# Altium PCB PCB_Ticketing_Slave_QFN.PcbDoc
Units mm, origin at the board's own origin, x right, y up, seen from the top; angles counter-clockwise.
Board outline 80.7 x 51.5 mm, 2 copper layers (Top Layer, Bottom Layer), stack 1.586 mm thick; 49 components, 35 nets, 191 pads, 70 vias.
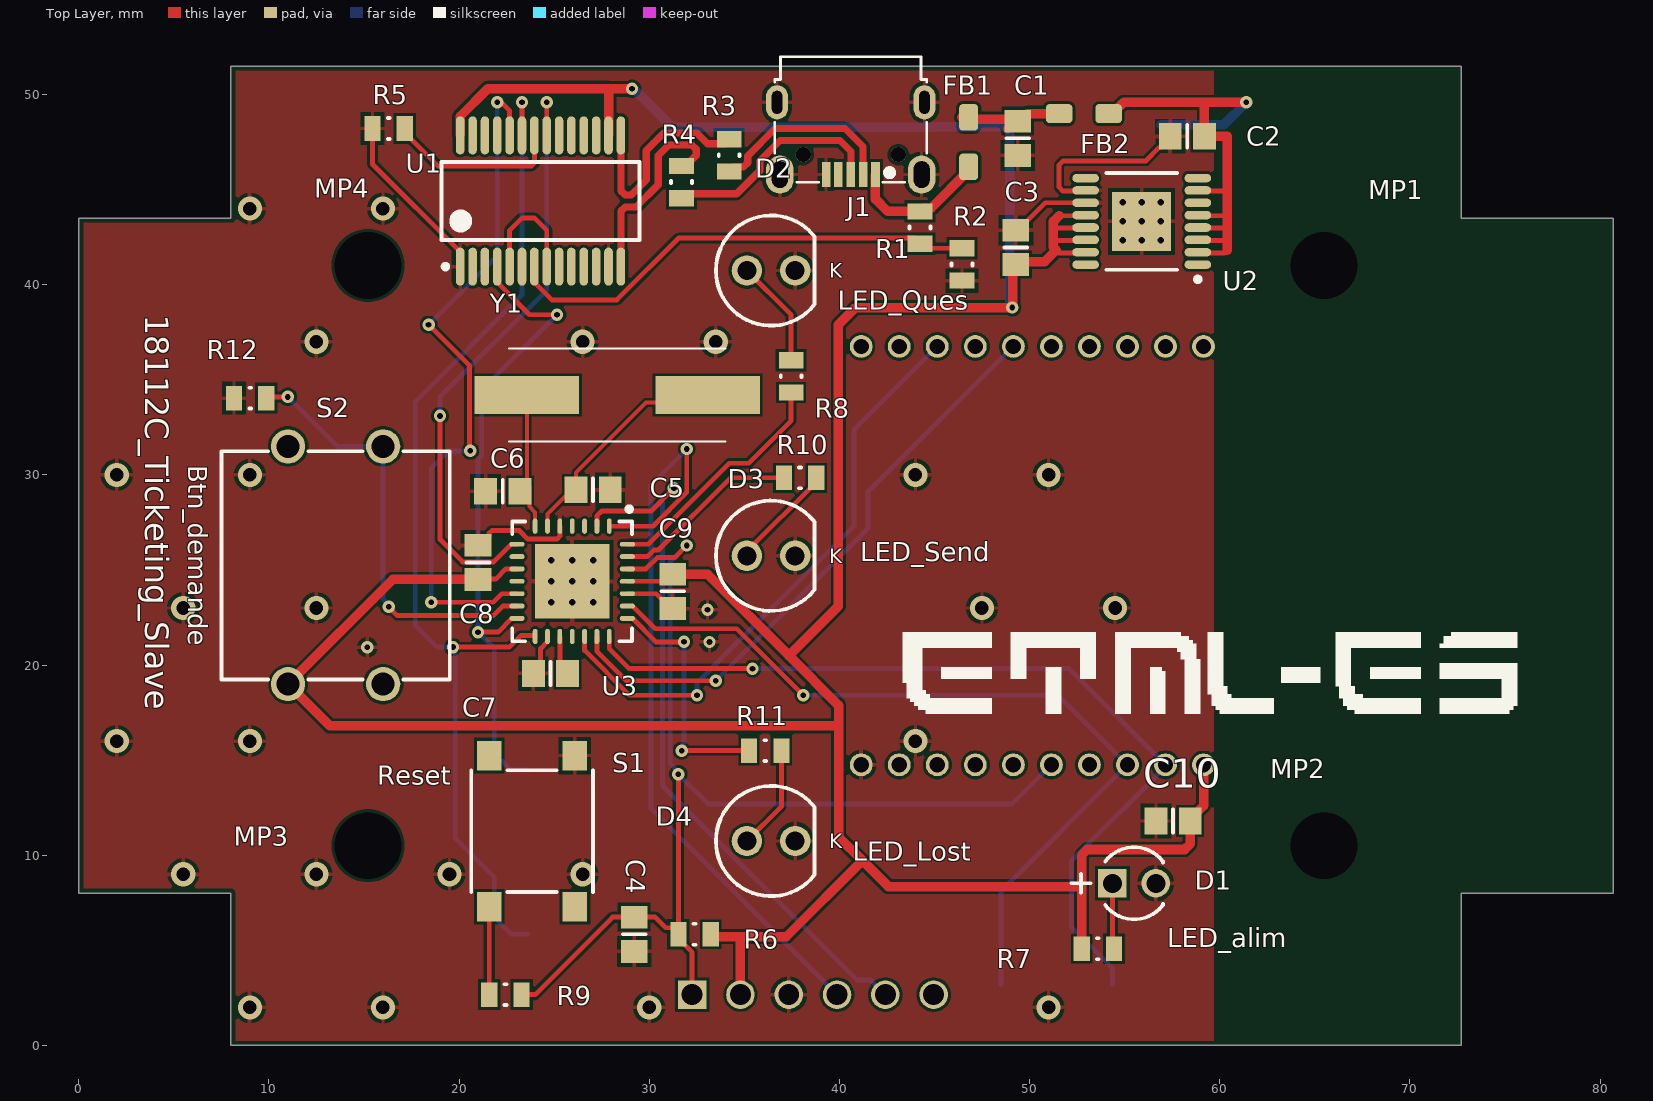
[diagram p0: Top Layer view]
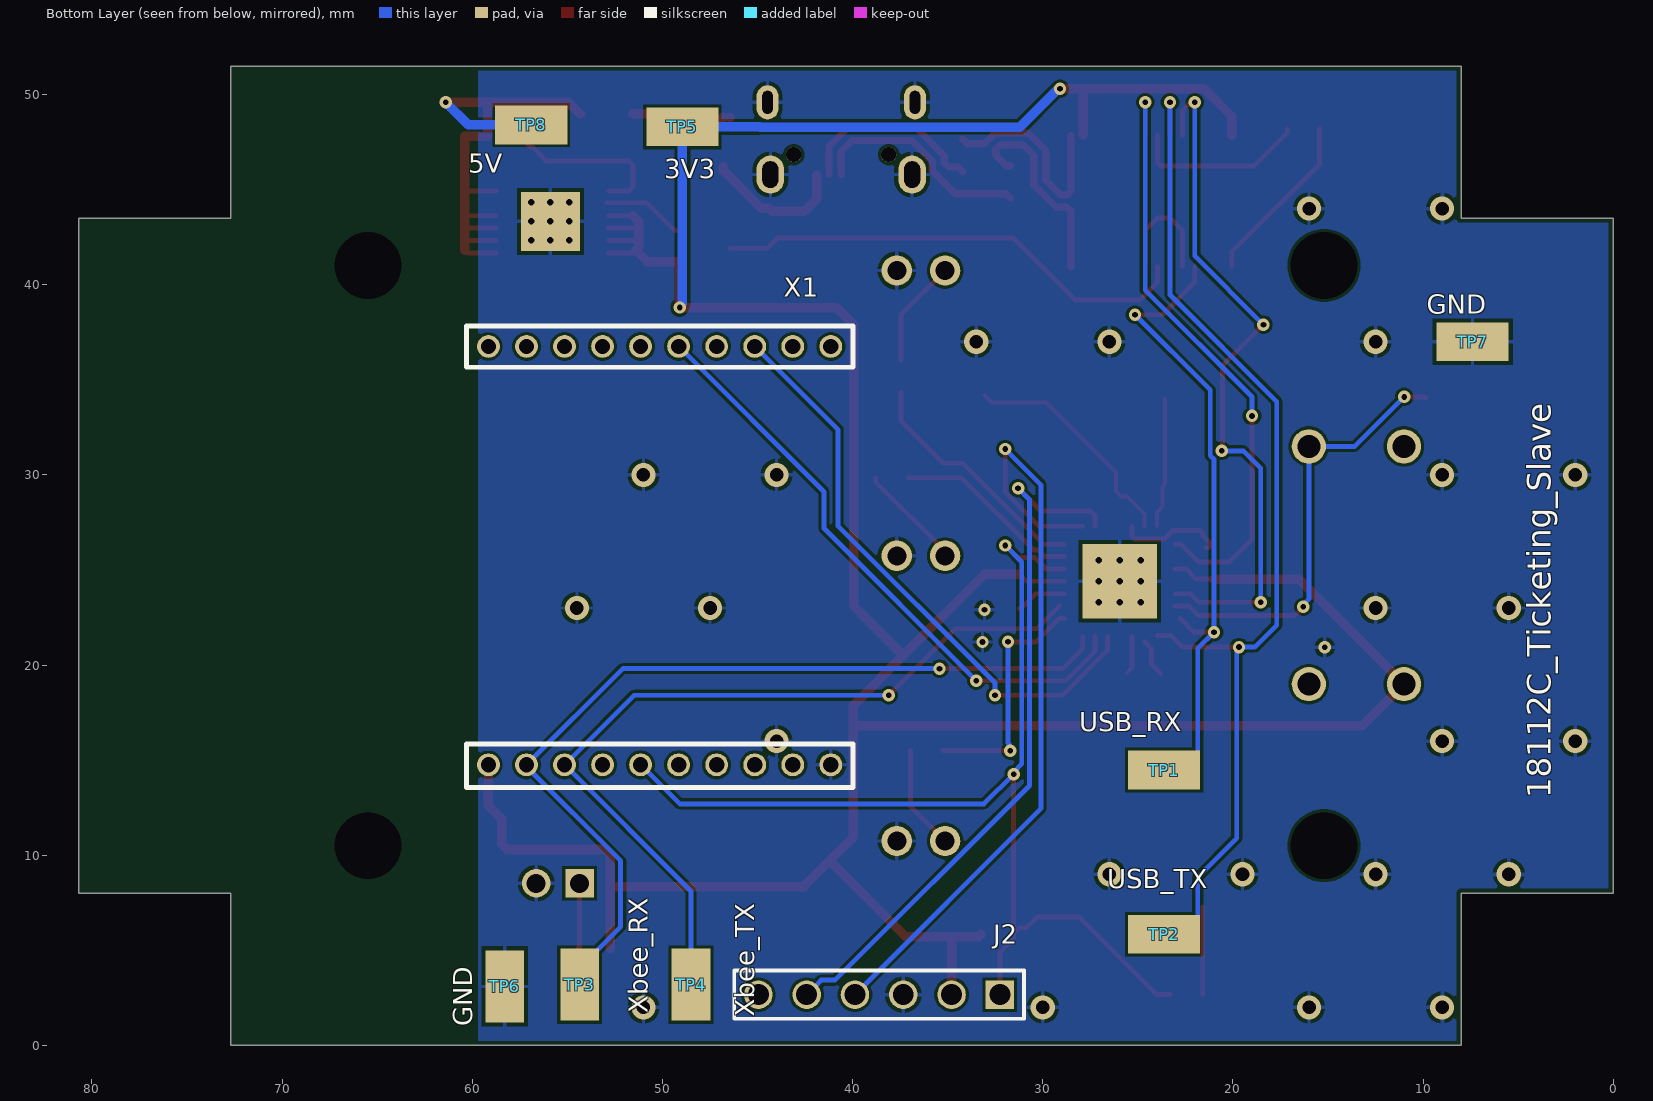
[diagram p1: Bottom Layer view, seen from below]

## Layer stack, top to bottom
Top Solder: solder mask 0.0102, Solder Resist, Dk 3.5
Top Layer: signal copper 0.018
Dielectric1: core 1.55, FR-4, Dk 4.8
Bottom Layer: signal copper 0.018
Bottom Solder: solder mask 0.0102, Solder Resist, Dk 3.5

## Board outline
0,8 0,43.5 8,43.5 8,51.5 72.7,51.5 72.7,43.5 80.7,43.5 80.7,8 72.7,8 72.7,0 8,0 8,8

## Design rules (kind name [scope] priority, off if disabled: settings)
BoardOutlineClearance [All] p1: gap=0.25 ignorepadtopadclearanceinfootprint=FALSE except(0: Arc-SplitContinuation Track-SplitContinuation SMDPad-SplitContinuation THPad-SplitContinuation Via-SplitContinuation Fill-SplitContinuation Poly-SplitContinuation Region-SplitContinuation Text-SplitContinuation)
Clearance Clearance-xPP-xTP-xTT [All] p1: gap=0.15 ignorepadtopadclearanceinfootprint=FALSE except(0: Arc-Hole Track-Hole SMDPad-Hole THPad-Hole Via-Hole Fill-Hole Poly-Hole Region-Hole Text-Hole)
ComponentClearance [All] p1: gap=0.25 collisioncheckmode=3 verticalgap=0.25 showdistances=FALSE
DiffPairsRouting [All] p1: maxlimit=0.25 minlimit=0.25 mostfreqgap=0.25 toplayer_minwidth=0.381 toplayer_maxwidth=0.381 toplayer_prefwidth=0.381 bottomlayer_minwidth=0.381 bottomlayer_maxwidth=0.381 bottomlayer_prefwidth=0.381 maxuncoupledlength=12.5
Height [All] p1: minheight=0 maxheight=25 prefheight=12.5
HoleSize HoleSize-PTH [All] p1: absolutevalues=TRUE maxlimit=10 minlimit=0.25 maxpercent=80.000 minpercent=20.000
HoleToHoleClearance [All] p1: gap=0.35 allowstackedmicrovias=TRUE
MinimumAnnularRing "Minimum IAR  >0.45mm" [((ObjectKind = 'Pad') OR (ObjectKind = 'Via')) And (Layer = 'MultiLayer') And (HoleDiameter > AsMM(0.45))] p1: minimumring=0.175 // minimum inner annular ring for pads > 0.45mm finished hole size
MinimumAnnularRing "Minimum IAR <=0.45mm" [((ObjectKind = 'Pad') OR (ObjectKind = 'Via')) And (Layer = 'MultiLayer') And (HoleDiameter <= AsMM(0.45))] p2: minimumring=0.175 // minimum inner annular ring for pads <= 0.45mm finished hole size
MinimumSolderMaskSliver [All] p1: minsoldermaskwidth=0.08
PasteMaskExpansion [All] p1: expansion=-0.025
PlaneClearance PlaneClearance-IPI [All] p1: clearance=0.25
PlaneConnect [All] p1: planeconnectstyle=Relief reliefexpansion=0.175 reliefentries=4 reliefconductorwidth=0.2 reliefairgap=0.2
PolygonConnect PolygonConnect-xTW [All] p1: connectstyle=Relief reliefconductorwidth=0.2 reliefentries=4 polygonreliefangle="90 Angle" airgapwidth=0.2
RoutingCorners [All] p1: cornerstyle=45-Degree minsetback=2.5 maxsetback=2.5
RoutingVias RoutingViasES [All] p1: holewidth=0.3 width=0.65 viastyle="Through Hole" minholewidth=0.25 minwidth=0.61 maxholewidth=0.45 maxwidth=0.8 // finishet hole size <= 0.45mm
SilkToSilkClearance [All] p1: silktosilkclearance=0.2
SilkToSolderMaskClearance SilkscreenOverComponentPads [IsPad] p1: minsilkscreentomaskgap=0.2 clearancetoexposedcopper=TRUE
SolderMaskExpansion [All] p1: expansion=0 istentingtop=FALSE
UnRoutedNet [All] p1: checkbadconnections=TRUE
Width "Width Power" [InNetClass('POWER')] p1: maxlimit=0.5 minlimit=0.254 preferedwidth=0.5
Width Width-xTW [All] p2: maxlimit=1.5 minlimit=0.15 preferedwidth=0.254
17 further rules are at their usual default settings.

## Classes and differential pairs
net class POWER: 3V3 5V GND NetC1_1 NetR1_2 NetU2_6 VBUS
component class Designator: D1 D2 D3 D4 MP1 MP2 MP3 MP4 R7 R8 R10 R11 R12 S2
differential pair USB_D: +USB_D_P -USB_D_N
differential pair U_D: +U_D_P -U_D_N

## Components (designator, comment, footprint, x,y, rotation, side; value= is the part's Value field where it differs from the comment)
C1 "680nF" 6-0805_N 49.384,47.7 r270 top
C2 "10uF" 6-0805_N 58.3,47.8 r180 top
C3 "10uF" 6-0805_N 49.284,41.963 r270 top
C4 "120nF" 6-0805_N 29.21,5.842 r90 top
C5 "22pF" 6-0805_N 27.052,29.21 r180 top
C6 "22pF" 6-0805_N 22.3,29.135 r0 top
C7 "10uF" 6-0805_N 24.811,19.558 r0 top
C8 "100nF" 6-0805_N 21,25.4 r270 top
C9 "100nF" 6-0805_N 31.242,23.876 r90 top
C10 "100nF" 6-0805_N 57.551,11.8 r0 top
D1 "WP424IDT" LED-2P-2.28-3MM 55.499,8.525 r0 top
D2 "WP7113LGD" "Type 5mm" 36.41,40.746 r0 top locked
D3 "WP7113ND" "Type 5mm" 36.41,25.746 r0 top locked
D4 "WP7113LID" "Type 5mm" 36.41,10.746 r0 top locked
FB1 "600Ohm, 2A" "WE-CBF_0805_High Current" 46.8,47.5 r90 top
FB2 "600Ohm, 2A" "WE-CBF_0805_High Current" 52.859,49 r0 top
J1 "629105150521" 629105150521 40.6,48.691 r180 top
J2 "76384-406LF" 76384-406LF 32.258,2.667 r0 bottom
MP1 "M3" 9774010151 65.485,41.01 r0 top locked
MP2 "M3" 9774010151 65.485,10.5 r0 top locked
MP3 "M3" 9774010151 15.215,10.5 r0 top locked
MP4 "M3" 9774010151 15.215,41.01 r0 top locked
R1 "10k" RESC0805(2012)_L 44.244,43.007 r270 top
R2 "20k" RESC0805(2012)_L 46.45,41.063 r270 top
R3 "24R" RESC0805(2012)_L 34.207,46.8 r90 top
R4 "24R" RESC0805(2012)_L 31.7,45.4 r90 top
R5 "1k" RESC0805(2012)_L 16.3,48.212 r180 top
R6 "47k" RESC0805(2012)_L 32.385,5.842 r180 top
R7 "68" RESC0805(2012)_L 53.594,5.08 r180 top
R8 "750" RESC0805(2012)_L 37.465,35.179 r270 top
R9 "120" RESC0805(2012)_L 22.44,2.667 r0 top value=10k
R10 "68" RESC0805(2012)_L 37.934,29.845 r180 top value=680
R11 "820" RESC0805(2012)_L 36.1,15.5 r180 top value=680
R12 "10k" RESC0805(2012)_L 9.017,34.036 r180 top
S1 "430182050816" 430182050816 23.84,11.265 r270 top
S2 "430466073726" 4304x60737x6_12x12x7.3 13.51,25.246 r90 top locked
TP1 "" KSTN-5019_V 23.622,14.478 r180 bottom
TP2 "" KSTN-5019_V 23.622,5.842 r180 bottom
TP3 "" KSTN-5019_V 54.359,3.2 r270 bottom value=Xbee_RX
TP4 "" KSTN-5019_V 48.5,3.2 r270 bottom value=Xbee_TX
TP5 "" KSTN-5019_V 48.952,48.3 r0 bottom
TP6 "" KSTN-5019_V 58.3,3.1 r270 bottom
TP7 "" KSTN-5019_V 7.4,37 r0 bottom
TP8 "" KSTN-5019_V 56.9,48.4 r0 bottom
U1 "CY7C64225-28PVXC" CYP-PVX28_N 24.287,44.4 r90 top
U2 "MAX1793EUE33+" TSOP65P640X110_HS-17N 55.9,43.332 r180 top
U3 "PIC32MX130F064B-I/ML" MCHP-QFN-ML28_L 25.952,24.402 r270 top locked
X1 "Header 2x10" ZB-SB 50.15,25.755 r90 bottom locked
Y1 "LFXTAL003151" LFXTAL003151REEL 28.321,34.2 r180 top

## Footprints (in the part's own frame and the unit in brackets; to place one, negate y for a bottom-side part, rotate by r counter-clockwise, add the part's x,y. Pads: shape width x height; smd on the part's side, far side on the other; paste and mask are expansions set on the pad)
6-0805_N [mm] "Chip Resistor, Body 2.0x1.2mm, IPC Medium Density"
  rect 1.2x1.4 smd: 1(-0.9,0) 2(0.9,0)
  silkscreen extent 0,-0.6 0,0.6, body extent -1.07,-0.7 1.07,0.7, height 0.7
4304x60737x6_12x12x7.3 [mm] "12x12mm washable Tact Switch, THT version"
  round 1.8 hole 1.2: 1(-6.25,2.5) 2(6.25,2.5) 3(-6.25,-2.5) 4(6.25,-2.5)
  silkscreen extent -6,-6 6,6, body extent -6.99,-6 6.99,6, height 7.35
76384-406LF [mm] "Connector; Header; 6 Position"
  rect 1.5x1.5 hole 1.1: 1(0,0)
  round 1.5 hole 1.1: 2(2.54,0) 3(5.08,0) 4(7.62,0) 5(10.16,0) 6(12.7,0)
  silkscreen extent -1.27,-1.27 13.97,1.27, body extent -0.72,-2.58 13.52,2.67, height 8.84
9774010151 [mm] "M2.5 Thread Internal, Length 1mm"
  round 0 hole 3.51 unplated paste-403.566: 1(0,0)
430182050816 [mm] "SMD Tact Switch, body 6x6mm"
  rect 1.55x1.3 smd: 1(-3.975,2.25) 2(-3.975,-2.25) 3(3.975,2.25) 4(3.975,-2.25)
  silkscreen extent -3.2,-3.2 3.2,3.2, body extent -4.5,-3.1 4.5,3.1, height 5.03
629105150521 [mm] "Micro USB 2.0 SMT Type B Horizontal 5 Contacts High Current"
  rect 0.45x1.3 smd: 1(-1.3,2.9) 2(-0.65,2.9) 3(0,2.9) 4(0.65,2.9) 5(1.3,2.9)
  oval 1.15x1.8 hole 0.55 slot 1.2 at 90 deg: Shell(-3.875,-0.9) Shell(3.875,-0.9)
  oval 1.45x2 hole 0.85 slot 1.4 at 90 deg: Shell(-3.725,2.9) Shell(3.725,2.9)
  round 0.8 hole 0.8 unplated: ""(-2.5,1.85) ""(2.5,1.85)
  silkscreen extent -4,-3.3 4,3.3, body extent -4,-3.3 4,3.3, height 2.71
CYP-PVX28_N [mm] "SOP, 28-Leads, Body 10.2x5.3mm, Pitch 0.65mm, IPC Medium Density"
  oval 2x0.45 smd: 1(-3.45,4.225) 2(-3.45,3.575) 3(-3.45,2.925) 4(-3.45,2.275) 5(-3.45,1.625) 6(-3.45,0.975) 7(-3.45,0.325) 8(-3.45,-0.325) 9(-3.45,-0.975) 10(-3.45,-1.625) 11(-3.45,-2.275) 12(-3.45,-2.925) 13(-3.45,-3.575) 14(-3.45,-4.225) 15(3.45,-4.225) 16(3.45,-3.575) 17(3.45,-2.925) 18(3.45,-2.275) 19(3.45,-1.625) 20(3.45,-0.975) 21(3.45,-0.325) 22(3.45,0.325) 23(3.45,0.975) 24(3.45,1.625) 25(3.45,2.275) 26(3.45,2.925) 27(3.45,3.575) 28(3.45,4.225)
  silkscreen extent -3.57,-5.2 2.05,5.2, body extent -3,-4.95 3,4.95, height 1.75
KSTN-5019_V [mm] "Test Point, 1-Leads, Body 3.81x2.03mm"
  rect 3.8x2.03 smd: 1(0,0)
  body extent -1.91,-1.02 1.9,1.02, height 2.29
LED-2P-2.28-3MM [mm] "LED, 2-Leads, Dia 3mm, Pitch 2.28mm"
  rect 1.5x1.5 hole 1: 1(-1.14,0)
  round 1.5 hole 1: 2(1.14,0)
  silkscreen extent -3.29,-1.9 1.52,1.9, body extent -1.9,-1.91 1.52,1.91, height 5.3
LFXTAL003151REEL [mm]
  rect 5.5x2 smd: 1(-4.75,0) 2(4.75,0)
  silkscreen extent -5.7,-2.45 5.7,2.45, body extent -5.81,-2.35 5.8,2.35, height 4.2
MCHP-QFN-ML28_L [mm] "QFN, 28-Leads, Body 6x6mm, Pitch 0.65mm, Thermal Pad 3.7x3.7mm, IPC High Density"
  oval 0.8x0.25 smd: 1(-2.9,1.95) 2(-2.9,1.3) 3(-2.9,0.65) 4(-2.9,0) 5(-2.9,-0.65) 6(-2.9,-1.3) 7(-2.9,-1.95) 15(2.9,-1.95) 16(2.9,-1.3) 17(2.9,-0.65) 18(2.9,0) 19(2.9,0.65) 20(2.9,1.3) 21(2.9,1.95)
  oval 0.25x0.8 smd: 8(-1.95,-2.9) 9(-1.3,-2.9) 10(-0.65,-2.9) 11(0,-2.9) 12(0.65,-2.9) 13(1.3,-2.9) 14(1.95,-2.9) 22(1.95,2.9) 23(1.3,2.9) 24(0.65,2.9) 25(0,2.9) 26(-0.65,2.9) 27(-1.3,2.9) 28(-1.95,2.9)
  rect 3.93x3.93 smd: 29(0,0)
  rect 3.93x3.93 smd far side: 29(0,0)
  silkscreen extent -3.92,-3.15 3.15,3.15, body extent -3,-3 3,3, height 1
RESC0805(2012)_L [mm] "Chip Resistor, Body 2.0x1.3mm, IPC High Density"
  rect 0.85x1.3 smd: 1(-0.85,0) 2(0.85,0)
  silkscreen extent -0.05,-0.55 0.05,0.55, body extent -1.1,-0.67 1.1,0.68, height 0.7
TSOP65P640X110_HS-17N [mm] "TSOP, 16-Leads, Body 5.00x4.40mm, Pitch 0.65mm, Thermal Pad 3.10x3.10mm, IPC Medium Density"
  oval 1.4x0.45 smd: 1(-2.95,2.275) 2(-2.95,1.625) 3(-2.95,0.975) 4(-2.95,0.325) 5(-2.95,-0.325) 6(-2.95,-0.975) 7(-2.95,-1.625) 8(-2.95,-2.275) 9(2.95,-2.275) 10(2.95,-1.625) 11(2.95,-0.975) 12(2.95,-0.325) 13(2.95,0.325) 14(2.95,0.975) 15(2.95,1.625) 16(2.95,2.275)
  rect 3.1x3.1 smd: 17(0,0)
  rect 3.1x3.1 smd far side: 17(0,0)
  silkscreen extent -3.08,-2.55 1.85,3.17, body extent -3.19,-2.55 3.19,2.55, height 1.1
"Type 5mm" [mm] "THT, LED-5mm, 2pin- Body 5.8mm"
  round 1.6 hole 1: 1(1.27,0) 2(-1.27,0)
  silkscreen extent -2.9,-2.9 2.29,2.9, body extent -2.9,-2.9 2.5,2.9, height 11.7
"WE-CBF_0805_High Current" [mm]
  rrect40% 1.4x1 smd: 1(-1.3,0) 2(1.3,0)
  body extent -1,-0.6 1,0.6, height 0.9
ZB-SB [mm] "Header"
  round 1.2 hole 0.8: 1(-11,9) 2(-11,7) 3(-11,5) 4(-11,3) 5(-11,1) 6(-11,-1) 7(-11,-3) 8(-11,-5) 9(-11,-7) 10(-11,-9) 11(11,9) 12(11,7) 13(11,5) 14(11,3) 15(11,1) 16(11,-1) 17(11,-3) 18(11,-5) 19(11,-7) 20(11,-9)
  silkscreen extent -12.19,-10.16 12.06,10.16, body extent -12.55,-10.34 12.45,30.66, height 7.5

## Part data
C1: library part 885012207098, "WCAP-CSGP General Purpose Ceramic Capacitors, size 0805, 100nF, +/-10%, 50VDC", Supplier Part Number=732-7663-1-ND, Capacitance=680nF, Supplier=Digi-Key, Supplier Part Number 1=732-7663-1-ND, Supplier unit price=0.13, Technical Reference=X7R0805104K050DFCT10000
C2 C3 C7: library part Cap, "Capacitor", Supplier Part Number=1276-1298-1-ND, Supplier=Digi-Key, Supplier unit price=0.1
  C2 C3: Capacitance=10uF, LatestRevisionDate=17-Jul-2002, LatestRevisionNote="Re-released for DXP Platform.", PackageDescription="Radial Cap, Thru-Hole; 2 Leads; 0.3 in Pin Spacing", PackageReference=RAD-0.3, Published=8-Jun-2000, Publisher="Altium Limited"
C4: library part Cap, "Capacitor", Supplier Part Number=311-4323-1-ND, Supplier=Digi-Key, Supplier unit price=0.18
C5 C6: library part CMP-2007-03167-1, "VJ0805Y104KNAAT", Supplier Part Number=399-C0805C220J5GAC7800CT-ND, Supplier=Digi-Key, Supplier unit price=0.1
C8 C9: library part Cap, "Capacitor", Supplier Part Number=399-C0805C104M5RAC7800CT-ND, Supplier=Digi-Key, Supplier unit price=0.1
C10: library part Cap_1, "Capacitor", Supplier Part Number=399-C0805C104M5RAC7800CT-ND, Supplier=Digi-Key, Supplier unit price=0.1
D1: library part LED, "LED", Color=Red, Supplier Part Number=754-1305-ND, Supplier=Digi-Key, Supplier unit price=0.4
D2: library part LED, "LED", Color=Green, Supplier Part Number=754-1265-ND, Supplier=Digi-Key, Supplier unit price=0.33
D3: library part LED, "LED", Color=Orange, Supplier Part Number=754-1896-ND, Supplier=Digi-Key, Supplier unit price=0.3
D4: library part LED, "LED", Color=Red, Supplier Part Number=754-1266-ND, Supplier=Digi-Key, Supplier unit price=0.33
FB1 FB2: library part 742792040, "WE-CBF SMT EMI Suppression Ferrite Bead, size 0805, 600Ohm, 2A", DC Resistance max.=0.15Ohm, Operating Temperature="-55 to +125degC", Rated Current=2A, Supplier Part Number=732-1620-1-ND, ComponentLink1Description=Manufacturer, ComponentLink1URL=http://www.we-online.de, ComponentLink2Description=Datasheet, ComponentLink2URL=https://katalog.we-online.com/pbs/datasheet/742792040.pdf, Impedance max.=700Ohm, Impedance@100 MHz=600Ohm, Mounting Technology=SMT, Packaging="Tape and Reel", Part Number=742792040, Published Date="March 2019", Publisher="Wurth Elektronik", Size=0805, Supplier=Digi-Key, Supplier Part Number 1=732-1620-1-ND, Supplier unit price=0.22, Type="High Current"
J1: "Micro USB 2.0 SMT Type B Horizontal 5 Contacts High Current WR-COM", Part Number=732-5960-1-ND, ComponentLink1Description=Manufacturer, ComponentLink1URL=http://www.we-online.de, ComponentLink2Description=Datasheet, ComponentLink2URL=http://katalog.we-online.de/em/datasheet/629105150521.pdf, Construction=SMT, Gender=Receptacle, Interface Type="Type B", Published Date="April 2017", Publisher="Wurth Elektronik", Sub-Family="Micro USB 2.0", Supplier=Digi-key, Supplier Part Number=732-5960-1-ND, Supplier unit price=2.12, Type=Horizontal
J2: library part "Header 6", "Header, 6-Pin", Supplier Part Number 1=609-1321-ND, LatestRevisionDate=17-Jul-2002, LatestRevisionNote="Re-released for DXP Platform.", Publisher="Altium Limited", Supplier 1=Digi-Key, Supplier unit price=0.66
MP1 MP2 MP3 MP4: library part 9774010151, "WA-SMSI SMT Steel Spacer, M2.5 Thread Internal, Length 1mm", Supplier=Digi-Key
R1: library part CMP-1013-00122-1, "100K 0.125W 5% 0805 (2012 Metric)  SMD", Case-EIA=0805, Case-Metric=2012, Power="0.125 W", Supplier Part Number=311-10KLGCT-ND, Tolerance="5 %", Supplier=Digi-Key, Supplier unit price=0.1, Technology=SMT
R2: library part CMP-1013-00122-1, "100K 0.125W 5% 0805 (2012 Metric)  SMD", Case-EIA=0805, Case-Metric=2012, Power="0.125 W", Supplier Part Number=RNCP0805FTD20K0CT-ND, Tolerance="5 %", Supplier=Digi-Key, Supplier unit price=0.1, Technology=SMT
R3 R4: library part CMP-1013-00122-1, "100K 0.125W 5% 0805 (2012 Metric)  SMD", Case-EIA=0805, Case-Metric=2012, Power="0.125 W", Supplier Part Number=311-24.0CRCT-ND, Tolerance="5 %", Supplier=Digi-Key, Supplier unit price=0.1, Technology=SMT
R5: library part CMP-1013-00122-1, "100K 0.125W 5% 0805 (2012 Metric)  SMD", Case-EIA=0805, Case-Metric=2012, Power="0.125 W", Supplier Part Number=RNCP0805FTD1K00CT-ND, Tolerance="5 %", Supplier=Digi-Key, Supplier unit price=0.1, Technology=SMT
R6: library part CMP-1013-00122-1, "100K 0.125W 5% 0805 (2012 Metric)  SMD", Supplier Part Number=A130144CT-ND, Supplier=Digi-Key, Supplier unit price=0.1
R7 R10: library part CMP-1013-00122-1, "100K 0.125W 5% 0805 (2012 Metric)  SMD", Supplier Part Number=RMCF0805JT68R0CT-ND, Supplier=Digi-Key, Supplier unit price=0.1
R8: library part CMP-1013-00122-1, "100K 0.125W 5% 0805 (2012 Metric)  SMD", Supplier Part Number=A126386CT-ND, Supplier=Digi-Key, Supplier unit price=0.1
R9: library part CMP-1013-00122-1, "100K 0.125W 5% 0805 (2012 Metric)  SMD", Supplier Part Number=A129738CT-ND, Supplier=Digi-Key, Supplier unit price=0.1
R11: library part CMP-1013-00122-1, "100K 0.125W 5% 0805 (2012 Metric)  SMD", Supplier Part Number=A129748CT-ND, Supplier=Digi-Key, Supplier unit price=0.1
R12: library part CMP-1013-00122-1, "100K 0.125W 5% 0805 (2012 Metric)  SMD", Supplier Part Number=311-10KLGCT-ND, Supplier=Digi-Key, Supplier unit price=0.1
S1: "6x6mm SMD Tact Switch WS-TASV, height 5 mm, 160 gf", Supplier Part Number=732-7005-1-ND, Supplier=Digi-Key, Supplier unit price=0.51
S2: "WS-TATV 12x12mm washable Tact Switch, THT version", Supplier Part Number=430466073726-ND, Supplier=Digi-Key, Supplier unit price=0.56
TP1 TP2 TP5 TP6 TP7 TP8: library part CMP-1672-00008-1, "Test Point, 1 Position SMD, RoHS, Tape and Reel", Package Quantity=1000, Supplier Part Number=36-5019CT-ND, ComponentLink1Description="Manufacturer URL", ComponentLink1URL=http://www.keyelco.com/, ComponentLink2Description=Datasheet, ComponentLink2URL=http://www.keyelco.com/product-pdf.cfm?p=1357, Contact Plating=Silver, DatasheetVersion=03/2014, Mount="Surface Mount", Mounting Technology="Surface Mount", PackageDescription="1-Pin Surface Mount Device, Body 3.81 x 2.03 mm", PackageReference=5019, Packaging="Tape and Reel", Pins=1, RoHSCompliant=True, Supplier=Digi-Key, Supplier unit price=0.33
TP3 TP4: library part CMP-1672-00008-1, "Test Point, 1 Position SMD, RoHS, Tape and Reel", Supplier Part Number=36-5019CT-ND, Supplier=Digi-Key, Supplier unit price=0.33
U1: library part CMP-0967-00143-1, "USB-to-UART Bridge Controller, 3 to 5.25 V, 0 to 70 degC, 28-Pin SSOP (PVX28), Tube", Manufacturer=Cypress, Max. Operating Temp. (degreesC)=70, Max. Operating Voltage (V)=5.25, Min. Operating Temp. (degreesC)=0, Min. Operating Voltage (V)=3, Part Number=428-3158-ND, ComponentLink1Description="Manufacturer URL", ComponentLink1URL=http://www.cypress.com/, ComponentLink2Description=Datasheet, ComponentLink2URL=http://www.cypress.com/?docID=48153, ComponentLink3Description="Package Specification", ComponentLink3URL=http://www.cypress.com/?docID=1371, DatasheetVersion="Rev. *D", Manufacturer Part Number=CY7C64225-28PVXC, Memory Architecture=Flash, Mounting Technology="Surface Mount", PackageDescription="28-Pin Super Small Outline Package, Body 10.2 x 5.3 mm, Pitch 0.65 mm", PackageReference=PVX28, PackageVersion="Rev. *C, 10/2001", Packing=Tube, PartNumber=CY7C64225-28PVXC, RoHS=Pb-Free, Supplier=Digi-key, Supplier Part Number=428-3158-ND, Supplier unit price=3.83
U2: library part MAX1793, Supplier Part Number=MAX1793EUE33+-ND, Supplier=Digi-Key, Supplier unit price=3.92
U3: library part CMP-0048-00437-1, "32-bit Microcontroller with Audio and Graphics Interface, USB and Advanced Analog, 40 MHz, 21 I/O, PMP, -40 to 85 degC, 28-pin QFN (ML28), Tube", Supplier=Digi-Key, Supplier Part Number=PIC32MX130F064B-I/ML, Supplier unit price=3.61
X1: library part "HDR ZB-SB 2x10_1", "Header 2x10 / Xbee de letml(1623) ou xbee XB24CAUIT-001", Supplier=Digi-Key
Y1: library part LFXTAL003151REEL, "Crystal or Oscillator", Frequency=8MHz, Supplier Part Number=9713794, Supplier=Farnell, Supplier unit price=0.392

## Via types
v1: diameter 0.65, hole 0.3, Top Layer to Bottom Layer, tented both sides, 28 vias
v2: diameter 1.27, hole 0.711, Top Layer to Bottom Layer, tented both sides, 24 vias
v3: diameter 0.75, hole 0.35, Top Layer to Bottom Layer, 18 vias

## Nets (pads, with @x,y where several pads share a name; then routed paths per layer and width w, separated by ;. In a path a pad name is that pad's centre, name@x,y a point inside that pad or via, vN(x,y) a via of type N, cw(c..) or ccw(c..) an arc to the next point about the centre after c; other vN are vias at no path point)
3V3: C3.2 C8.2 C9.2 C10.2 J2.2 R6.1 R7.2 S2.1 TP5.1 U1.16 U1.28 U2.12 U2.13 U2.14 U2.15 U3.10 U3.25 X1.1 | length 191.7
  Top Layer w0.254: C8.2 21.02,24.52 21.932,24.52 22.464,25.052 U3.10 ; U3.25 30.868,24.402 C9.2 ; C3.2@49.184,41.063 C3.2 ; 51.261,42.325 U2.14@52.85,42.325 ; 51.261,42.863 51.373,42.975 U2.13@52.85,42.975 ; 51.407,41.821 51.554,41.675 U2.15@52.85,41.675 ; 51.554,43.625 U2.12@52.85,43.625
  Top Layer w0.5: U1.28 20.062,48.859 21.519,50.316 27.871,50.316 27.887,50.3 v1(29.1,50.3) ; C8.2 16.514,24.5 S2.1 13.206,16.8 39.965,16.8 ; U1.16 27.862,50.3 ; C9.2 33.071,24.776 37.35,20.497 ; R6.1 33.362,5.715 34.798,5.715 ; J2.2 34.798,5.715 ; C3.2@49.134,41.213 50.799,41.213 51.407,41.821 51.261,41.968 51.261,42.325 51.261,42.863 51.261,43.332 51.554,43.625 ; C3.2@49.184,41.063 49.129,41.008 49.129,38.829 v1(49.1,38.8) 40.85,38.8 39.95,37.9 39.95,23.097 37.35,20.497 ; R7.2 52.744,8.349 ; X1.1 59.15,12.599 58.451,11.9 58.451,10.593 58.158,10.3 53.037,10.3 52.744,10.007 52.744,8.349 ; 34.798,5.715 37.21,5.715 41.212,9.717 ; 37.35,20.497 39.965,17.882 39.965,16.8 ; 39.965,16.8 39.965,10.964 41.212,9.717 ; 41.212,9.717 42.58,8.349 52.744,8.349
  Bottom Layer w0.5: v1(29.1,50.3) 29.2,50.3 31.209,48.291 44.879,48.291 44.888,48.3 TP5.1 48.952,38.989 49.1,38.841 v1(49.1,38.8)
5V: C2.1 FB2.2 TP8.1 U2.2 U2.3 U2.4 U2.5 U2.7 | length 29.8
  Top Layer w0.254: FB2.2 FB2.2@54.359,49 ; U2.2@58.75,41.675 60.256,41.675 60.405,41.824 ; U2.3@58.75,42.325 60.405,42.325 ; U2.4@58.75,42.975 60.405,42.975 ; U2.5@58.75,43.625 60.405,43.625 ; U2.7@58.75,44.925 60.4,44.925 ; 60.4,44.39 60.405,44.385
  Top Layer w0.5: FB2.2@54.359,49 54.95,49.591 59.2,49.591 ; 60.4,44.39 60.4,44.925 60.4,47.8 C2.1 59.2,49.591 ; 60.405,41.824 60.405,42.325 60.405,42.975 60.405,43.625 60.405,44.385 ; v1(61.4,49.591) 59.2,49.591
  Bottom Layer w0.5: TP8.1 60.209,48.4 v1(61.4,49.591)
Connect(M): U3.19 X1.18 | length 31.2
  Top Layer w0.254: U3.19 26.602,20.769 28.956,18.415 v1(32.512,18.415)
  Bottom Layer w0.254: v1(32.512,18.415) 32.512,19.055 40.766,27.309 40.766,32.371 X1.18
GND: C1.2 C2.2 C3.1 C4.1 C5.1 C6.1 C7.1 C8.1 C9.1 C10.1 D1.2 D2.1 D3.1 D4.1 J1.5 J1.Shell J2.3 R2.2 R5.2 R12.2 S1.1 TP6.1 TP7.1 U1.1 U1.13 U2.10 U2.11 U2.17 U3.5 U3.16 U3.24 U3.29 X1.10 | length 32.9
  Top Layer w0.254: R5.2 15.45,46.337 20.062,41.725 U1.1 ; C8.1 21.1,26.3 21.573,26.773 21.573,26.92 21.722,27.069 23.179,27.069 23.623,26.625 25.154,26.625 25.302,26.774 U3.5 ; C8.1@21.285,26.187 C8.1@21.435,26.187 ; C7.1@23.814,19.558 24.287,20.031 24.287,20.866 U3.16@24.65,21.229 ; U3.24 30.366,23.752 31.142,22.976 C9.1 ; C3.1@49.311,42.837 C3.1 49.384,42.863 50.828,44.307 U2.11 ; U2.10@52.85,44.925 51.756,44.925 51.554,45.127 51.554,46.3 51.754,46.5 56.1,46.5 56.827,47.227 56.927,47.227 57.4,47.7 C2.2
  other v1: 15.181,20.93 33.17,21.209 33.07,22.904
  other v2: 9,2 16,2 30,2 51,2 5.5,9 12.5,9 19.5,9 26.5,9 2,16 9,16 44,16 5.5,23 12.5,23 47.5,23 54.5,23 2,30 9,30 44,30 51,30 12.5,37 26.5,37 33.5,37 9,44 16,44
  other v3: 24.852,23.302 25.952,23.302 27.052,23.302 24.852,24.402 25.952,24.402 27.052,24.402 24.852,25.502 25.952,25.502 27.052,25.502 54.9,42.332 55.9,42.332 56.9,42.332 54.9,43.332 55.9,43.332 56.9,43.332 54.9,44.332 55.9,44.332 56.9,44.332
LED_Lost: R11.2 U3.22 | length 12.8
  Top Layer w0.254: U3.22 29.123,22.452 30.367,21.209 31.813,21.209 v1(31.833,21.229) ; v1(31.707,15.5) R11.2
  Bottom Layer w0.254: v1(31.707,15.5) 31.783,15.576 31.783,15.855 31.833,15.905 v1(31.833,21.229)
LED_Ques: R8.2 U3.28 | length 12.8
  Top Layer w0.254: U3.28 29.952,26.352 34.207,30.607 35.226,30.607 37.465,32.846 R8.2
LED_Send: R10.2 U3.27 | length 9.9
  Top Layer w0.254: U3.27 29.905,25.702 30.26,26.057 30.49,26.057 34.278,29.845 R10.2
LINK(M): U3.20 X1.16 | length 31.7
  Top Layer w0.254: U3.20 27.252,20.721 28.797,19.177 v1(33.5,19.177)
  Bottom Layer w0.254: v1(33.5,19.177) 41.506,27.183 41.506,29.111 X1.16
NetC1_1: C1.1 FB1.2 FB2.1 | length 5.6
  Top Layer w0.5: FB1.2 46.9,48.7 49.284,48.7 C1.1 49.484,48.6 49.884,49 FB2.1 ; C1.1@48.859,48.191 49.159,48.491 C1.1@49.159,48.691
NetC5_2: C5.2 U3.6 Y1.1 | length 12.2
  Top Layer w0.2: U3.6 24.652,27.95 24.858,28.155 25.57,28.867 25.884,28.867 26.152,29.135 26.152,30.116 29.836,33.8 32.671,33.8 Y1.1
NetC6_2: C6.2 U3.7 Y1.2 | length 6.9
  Top Layer w0.2: Y1.2@23.571,34 23.571,33.147 23.571,29.516 23.7,29.387 23.7,28.333 24.003,28.03 U3.7
NetC7_2: C7.2 U3.17 | length 2.1
  Top Layer w0.2: C7.2@25.302,19.87 C7.2@25.614,19.558
  Top Layer w0.254: C7.2@25.302,19.87 U3.17
NetD1_1: D1.1 R7.1 | length 3.6
  Top Layer w0.254: D1.1@54.359,8.636 54.359,5.165 R7.1
NetD2_2: D2.2 R8.1 | length 5.7
  Top Layer w0.254: D2.2 37.465,38.421 R8.1
NetD3_2: D3.2 R10.1 | length 5.6
  Top Layer w0.254: D3.2 35.14,25.976 38.784,29.62 R10.1
NetD4_2: D4.2 R11.1 | length 5.5
  Top Layer w0.254: D4.2 36.95,12.556 R11.1
NetR1_2: R1.2 R2.1 U1.7 | length 25.3
  Top Layer w0.254: U1.7 23.962,40.122 24.11,39.974 24.11,39.967 24.877,39.2 28.3,39.2 31.555,42.455 43.946,42.455 R1.2 44.487,41.913 R2.1
NetR5_1: R5.1 U1.22 | length 9.3
  Top Layer w0.254: R5.1 17.15,47.987 18.887,46.25 23.813,46.25 23.962,46.399 U1.22
NetR9_1: R9.1 S1.4 | length 4.6
  Top Layer w0.254: R9.1 S1.4
NetR12_1: R12.1 S2.4 U3.13 | length 23
  Top Layer w0.254: R12.1 9.931,34.1 v1(11,34.1) ; v1(16.3,23.062) 16.762,22.6 21.796,22.6 22.296,23.1 23.05,23.1 U3.13
  Bottom Layer w0.254: v1(11,34.1) 13.604,31.496 S2.4 16.01,23.459 16.3,23.169 v1(16.3,23.062)
NetU1_5: U1.5 U1.8 | length 6.3
  Top Layer w0.254: U1.5 22.662,42.862 23.3,43.5 23.975,43.5 24.612,42.863 U1.8
PGEC1: J2.5 U3.2 | length 37.3
  Top Layer w0.254: U3.2 27.252,27.842 27.511,28.1 30.1,28.1 v1(31.3,29.3)
  Bottom Layer w0.254: v1(31.3,29.3) 30.701,28.701 30.701,13.662 40.934,3.429 41.656,3.429 J2.5
PGED1: J2.4 U3.1 | length 40.6
  Top Layer w0.254: U3.1@27.904,27.302 30.202,27.302 31.975,29.075 v1(31.975,31.358)
  Bottom Layer w0.254: v1(31.975,31.358) 30.099,29.482 30.099,12.446 J2.4
Reset: C4.2 J2.1 R6.2 R9.2 U3.26 X1.5 | length 59.4
  Top Layer w0.254: R9.2 24.003,2.667 28.078,6.742 C4.2 ; U3.26 29.826,25.052 30.427,25.653 31.339,25.653 v1(31.975,26.289) ; C4.2@29.31,6.742 30.319,6.742 30.878,6.184 31.237,6.184 31.535,5.886 R6.2 ; v1(31.535,14.264) R6.2 ; J2.1 32.258,4.894 31.535,5.617 R6.2
  Bottom Layer w0.254: v1(31.975,26.289) 31.105,25.419 31.105,14.801 31.535,14.371 v1(31.535,14.264) 33.099,12.7 49.095,12.7 49.784,13.389 X1.5
U_D_N: J1.2 R3.1 | length 10.1
  Top Layer w0.381: R3.1 34.442,46.184 34.955,46.184 35.179,46.408 35.179,46.769 36.622,48.212 40.295,48.212 41.24,47.267 41.24,45.801 J1.2
U_D_P: J1.3 R4.1 | length 11.9
  Top Layer w0.381: R4.1 31.935,44.785 34.598,44.785 35.81,45.996 35.81,46.507 36.884,47.581 40.034,47.581 40.609,47.006 40.609,45.8 J1.3
USB_CTS: U1.24 U3.12 | length 37
  Top Layer w0.254: v1(18.4,37.9) 20.544,35.756 20.544,31.317 v1(20.597,31.264) ; v1(18.542,23.302) 21.802,23.302 22.252,23.752 U3.12 ; v1(22.012,49.591) 22.216,49.591 22.662,49.145 U1.24
  Bottom Layer w0.254: v1(18.4,37.9) 22.012,41.512 v1(22.012,49.591) ; v1(18.542,23.302) 18.542,30.353 19.452,31.264 v1(20.597,31.264)
USB_D_N: R3.2 U1.15 | length 11.3
  Top Layer w0.381: U1.15 28.512,44.939 28.735,44.715 29.051,44.715 29.847,45.512 29.847,47.062 30.757,47.971 32.515,47.971 33.07,47.415 33.972,47.415 R3.2
USB_D_P: R4.2 U1.14 | length 10.6
  Top Layer w0.381: U1.14 28.512,43.861 28.735,44.084 29.312,44.084 30.478,45.251 30.478,46.8 31.019,47.34 32.253,47.34 32.476,47.117 32.476,46.801 31.925,46.25 R4.2
USB_RTS: U1.21 U3.8 | length 32
  Top Layer w0.254: v1(19,33.1) 19,26.608 20.185,25.423 21.815,25.423 21.977,25.585 22.744,26.352 U3.8 ; U1.21 v1(24.612,49.591)
  Bottom Layer w0.254: v1(19,33.1) 19,34.1 24.612,39.712 v1(24.612,49.591)
USB_RX: TP1.1 U1.4 U3.14 | length 34
  Top Layer w0.254: v1(21,21.731) 22.06,21.731 U3.14@22.779,22.45 ; U1.4 22.012,40.122 22.16,39.974 22.16,39.967 23.706,38.421 v1(25.154,38.421)
  Bottom Layer w0.254: TP1.1 22.737,14.478 21.849,15.366 21.849,20.882 v1(21,21.731) 21,30.815 21.199,31.014 21.199,34.467 v1(25.154,38.421)
USB_TX: TP2.1 U1.23 U3.15 | length 55.8
  Top Layer w0.254: v1(19.683,20.943) 22.641,20.943 23.243,21.546 U3.15@24,21.546 ; U1.23 v1(23.312,49.591)
  Bottom Layer w0.254: v1(19.683,20.943) 18.857,20.943 17.7,22.1 17.7,33.851 23.312,39.463 v1(23.312,49.591) ; v1@19.8,20.943 19.8,10.9 21.849,8.851 21.849,6.73 22.737,5.842 TP2.1
VBUS: FB1.1 J1.1 R1.1 | length 7.5
  Top Layer w0.5: J1.1 41.9,44.5 42.543,43.857 R1.1 44.419,44.032 44.832,44.032 46.8,46 FB1.1
Xbee_RX: TP3.1 U3.21 X1.2 | length 46.9
  Top Layer w0.254: U3.21 27.902,20.866 28.956,19.812 v1(35.433,19.812)
  Bottom Layer w0.254: v1(35.433,19.812) 52.093,19.812 X1.2 57.15,14.65 52.2,9.7 52.2,6.244 54.359,4.085 TP3.1
Xbee_TX: TP4.1 U3.23 X1.3 | length 43.8
  Top Layer w0.254: U3.23@29.125,23.1 30.319,21.906 34.609,21.906 v1(38.1,18.415)
  Bottom Layer w0.254: v1(38.1,18.415) 51.49,18.415 X1.3 48.5,8.105 TP4.1
pads on no net: J1. J1.4 J2.6 MP1.1 MP2.1 MP3.1 MP4.1 S1.2 S1.3 S2.2 S2.3 U1.2 U1.3 U1.6 U1.9 U1.10 U1.11 U1.12 U1.17 U1.18 U1.19 U1.20 U1.25 U1.26 U1.27 U2.1 U2.6 U2.8 U2.9 U2.16 U3.3 U3.4 U3.9 U3.11 U3.18 X1.4 X1.6 X1.7 X1.8 X1.9 X1.11 X1.12 X1.13 X1.14 X1.15 X1.17 X1.19 X1.20

## Polygon pours and split planes (outlines as drawn)
GND on Bottom Layer "GND_L02_P001" (solid, remove dead copper, pour order 1): 59.69,51.5 59.69,0 8,0 8,8 0,8 0,43.5 8,43.5 8,51.5
GND on Top Layer "GND_L01_P000" (solid, remove dead copper, pour order 0): 8,8 8,0 59.69,0 59.69,51.5 8,51.5 8,43.5 0,43.5 0,8

## Silkscreen, mask and mechanical layers (free items; w line width, h text height)
Top Overlay:
  drawing of 12 lines, arcs and shapes, not listed
  text "LED_Ques" at 39.91,38.688 h1
  text "18112C_Ticketing_Slave" at 3.5,38.421 h1.25 r270
  text "Btn_demande" at 5.767,30.5 h1 r270
  text "LED_Send" at 41.1,25.467 h1
  text "Reset" at 15.7,13.7 h1
  text "LED_Lost" at 40.7,9.7 h1
  text "LED_alim" at 57.25,5.161 h1
Bottom Overlay:
  text "5V" at 60.21,45.891 h1
  text "3V3" at 49.9,45.6 h1
  text "GND" at 9.8,38.477 h1
  text "USB_RX" at 28.094,16.523 h1
  text "18112C_Ticketing_Slave" at 3.3,13 h1.25 r270
  text "USB_TX" at 26.6,8.267 h1
  text "Xbee_RX" at 50.767,1.7 h1 r270
  text "Xbee_TX" at 45.167,1.5 h1 r270
  text "GND" at 60,1 h1 r270
Board Outline (ES):
  the board outline again, w0.254

## Dimensions
80.7,8 to 72.7,0 on Board
80.7,43.5 to 80.7,8 on Board
73.1,51.5 to 72.7,0 on Board
0,43.5 to 8,51.9 on Board
8,51.5 to 72.7,51.9 on Board
0,43.5 to 80.7,43.5 on Board

## Text inside footprints (layer, text, board x,y; h text height)
D2: Top Overlay "K" at 39.458,40.365 h0.76; Components Courtyards "K" at 39.458,40.365 h0.76
D3: Top Overlay "K" at 39.458,25.365 h0.76; Components Courtyards "K" at 39.458,25.365 h0.76
D4: Top Overlay "K" at 39.458,10.365 h0.76; Components Courtyards "K" at 39.458,10.365 h0.76
J1: Components Courtyards "PCB Edge" at 42.5,51.091 h1 r180